# Altium PCB PCB.PcbDoc
Units mil, origin at the board's own origin, x right, y up, seen from the top; angles counter-clockwise.
Board outline 1910 x 1126.76 mil, 2 copper layers (Top Layer, Bottom Layer); 8 components, 4 nets, 21 pads, 1 vias.
Unrouted connection lines stored in the file: 1.
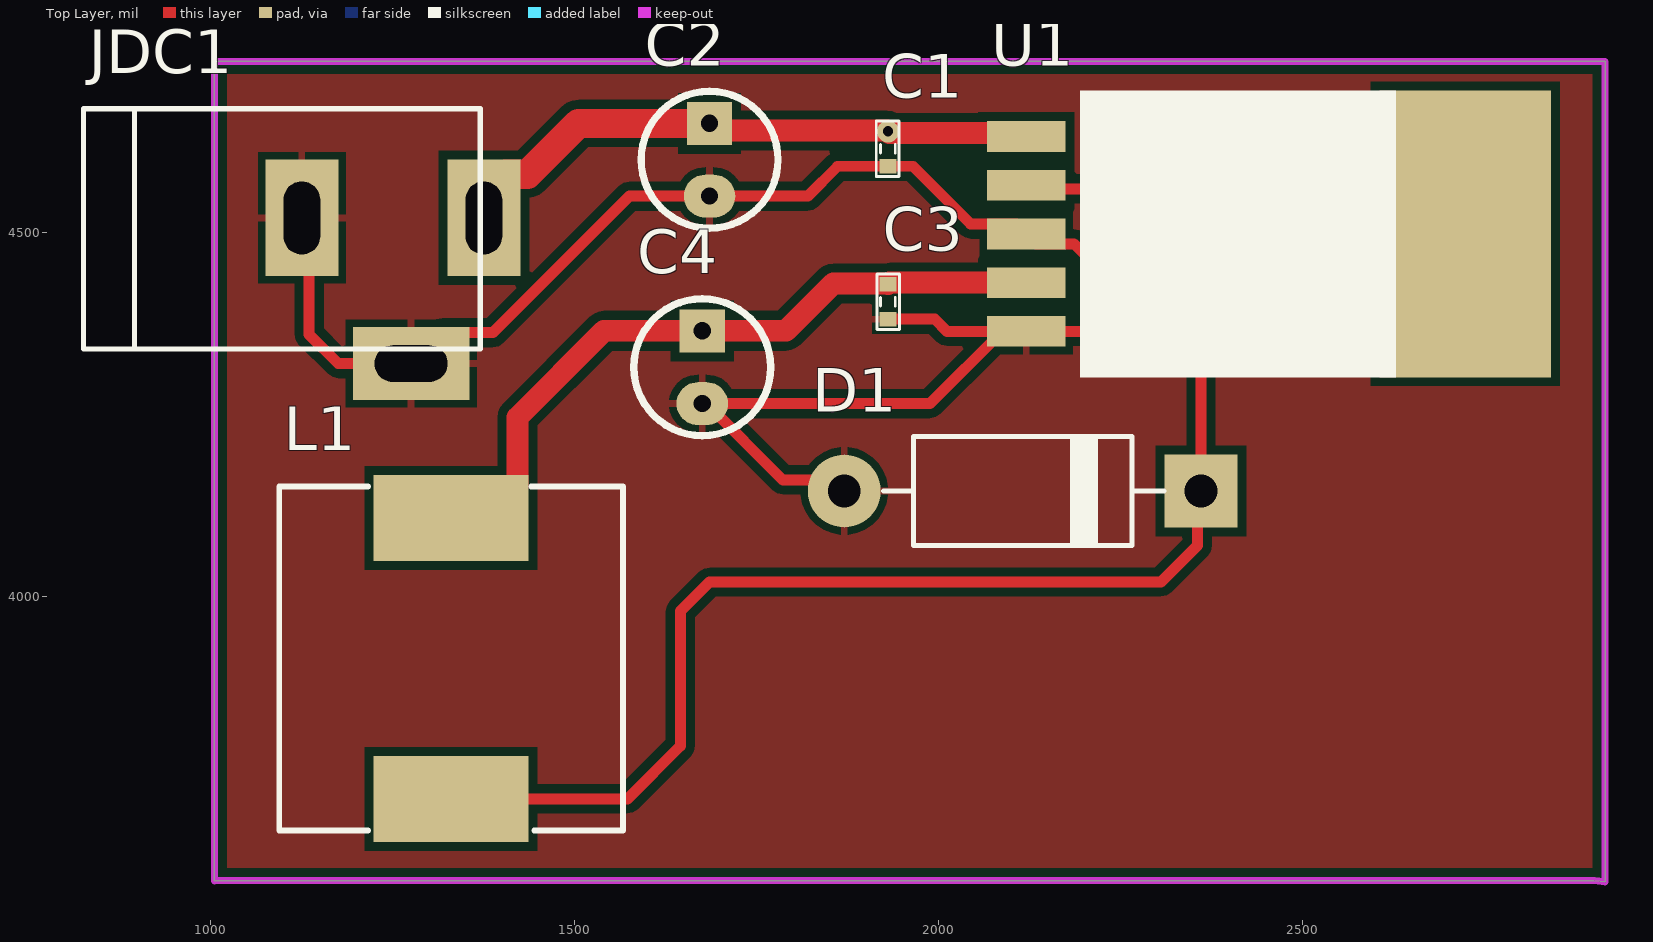
[diagram p0: Top Layer view]
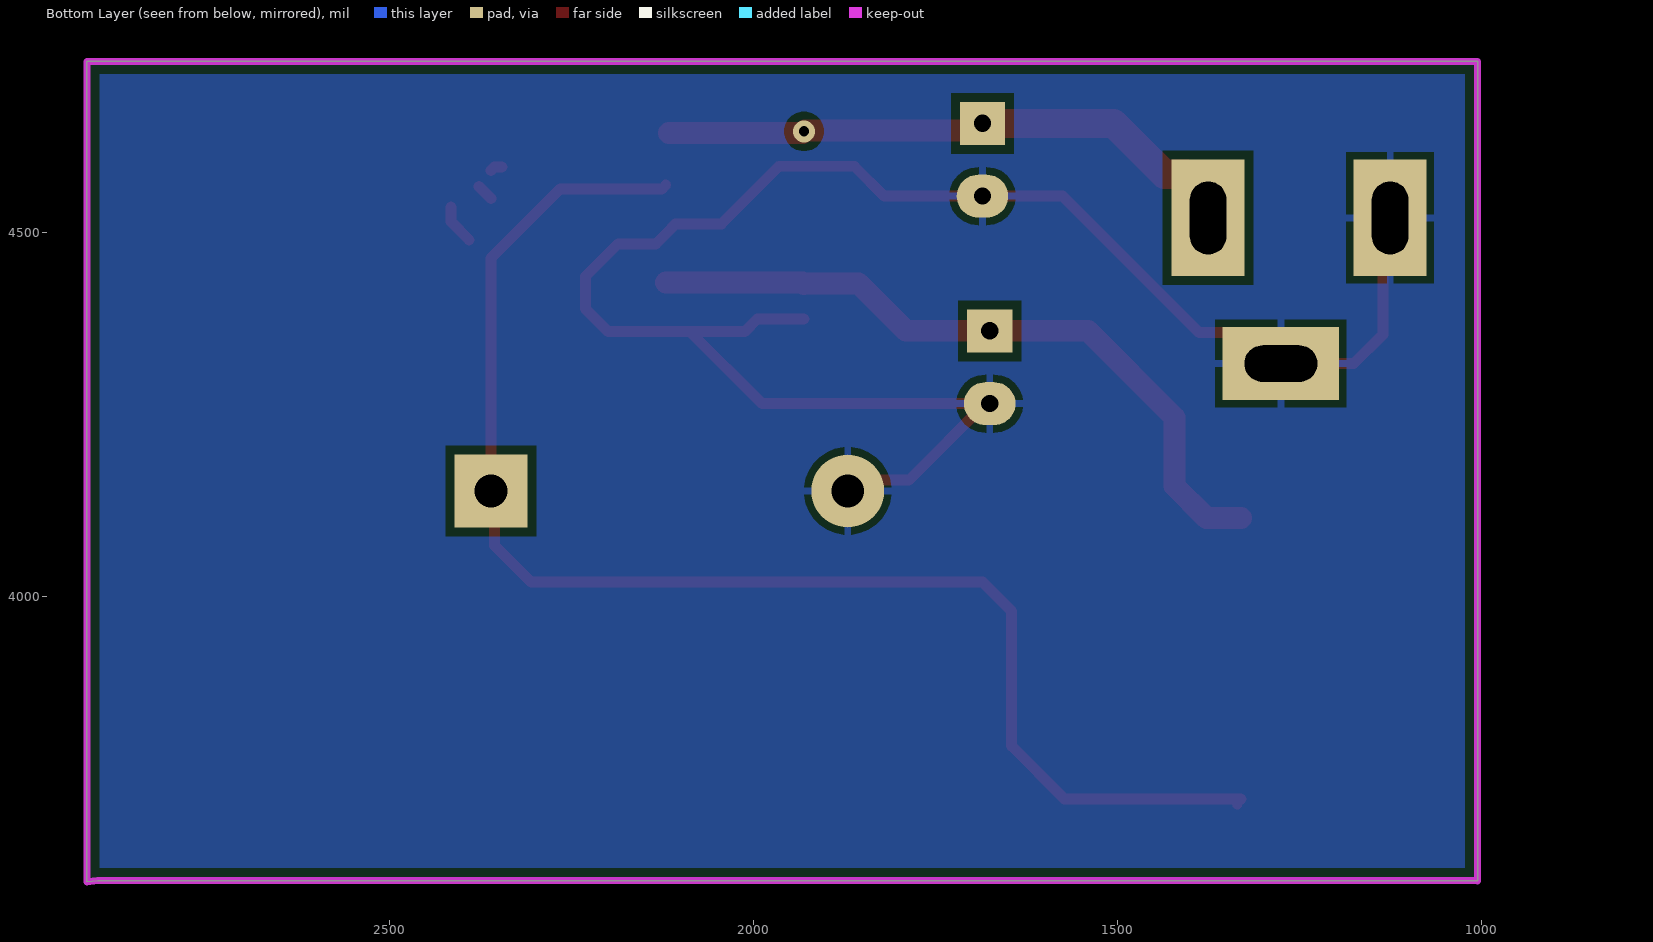
[diagram p1: Bottom Layer view, seen from below]
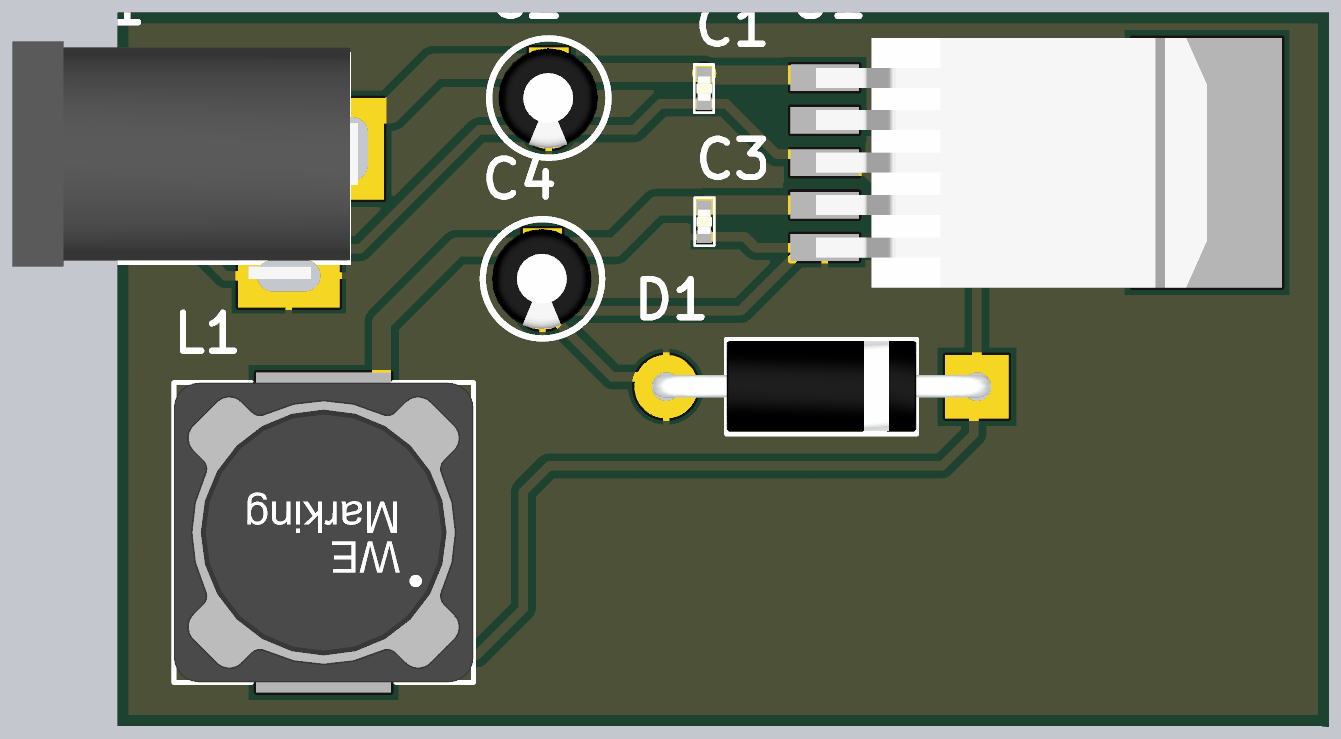
[diagram p2: 3D render of the assembled board from above, using the file's embedded part models]

## Layer stack, top to bottom
Top Solder: solder mask 0.4, Solder Resist, Dk 3.5
Top Layer: signal copper 1.4
Dielectric 1: dielectric 12.6, FR-4, Dk 4.8
Bottom Layer: signal copper 1.4
Bottom Solder: solder mask 0.4, Solder Resist, Dk 3.5

## Board outline
1005,3609.44 1005,4735 2915,4735 2915,3608.24 2900,3610 1010,3610

## Design rules (kind name [scope] priority, off if disabled: settings)
Clearance [All] p1: gap=12 ignorepadtopadclearanceinfootprint=FALSE
PolygonConnect [All] p1: connectstyle=Relief reliefconductorwidth=10 reliefentries=4 polygonreliefangle="90 Angle" airgapwidth=10
RoutingVias [All] p1: holewidth=14 width=30 viastyle="Through Hole" minholewidth=14 minwidth=30 maxholewidth=28 maxwidth=50
SolderMaskExpansion [All] p1: expansion=4 istentingtop=FALSE
Width [All] p1: maxlimit=40 minlimit=7 preferedwidth=15
30 further rules are at their usual default settings.

## Components (designator, comment, footprint, x,y, rotation, side; value= is the part's Value field where it differs from the comment)
C1 "103" CAP_0402 1930,4615 r90 top value=33p
C2 "104" CA-ALU-2.54 1685,4600 r270 top
C3 "103" CAP_0402 1930,4405 r270 top value=33p
C4 "330nF,10V" CA-ALU-2.54 1675,4315 r270 top value=104
D1 "Diode Schottky" DIO-3A 2385,4145 r180 top
JDC1 "Jac DC" DC-IN 1250,4420 r0 top
L1 "33uH" L-SMD-M-12x10 1330,3915 r180 top value="150 mH"
U1 "LM2976" TO263-5 2121,4498.07 r270 top

## Footprints (in the part's own frame and the unit in brackets; to place one, negate y for a bottom-side part, rotate by r counter-clockwise, add the part's x,y. Pads: shape width x height; smd on the part's side, far side on the other; paste and mask are expansions set on the pad)
CA-ALU-2.54 [mm]
  rect 1.5x1.58 hole 0.6: 1(-1.27,0)
  oval 1.5x1.8 hole 0.6: 2(1.27,0)
  silkscreen extent -2.39,-2.39 2.39,2.39, body extent -2,-2.03 1.99,1.97, height 7.01
CAP_0402 [mm]
  rect 0.5x0.6 smd: 1(-0.61,0) 2(0.61,0)
  silkscreen extent -0.97,-0.38 0.97,0.41, body extent -0.5,-0.27 0.5,0.26, height 0.35
DC-IN [mil] "Jac DC input"
  rect 100x160 hole 50 slot 100 at 90 deg: 1(125,100) 2(-125,100)
  rect 160x100 hole 50 slot 100 at 0 deg: 3(25,-100)
  silkscreen extent -425,-80 120,250, body extent -410,-105 134,269, height 434
DIO-3A [mil] "Diode 3A"
  round 100 hole 45: 1(515,0)
  rect 100x100 hole 45: 2(25,0)
  silkscreen extent 76,-75 461,75, body extent 4,-72 536,70, height 142
L-SMD-M-12x10 [mm] "WE-PDA SMD Shielded Power Inductor, 1210"
  rect 5.4x3 smd: 1(0,4.9) 2(0,-4.9)
  silkscreen extent -6,-6 6,6, body extent -6,-6 6,6, height 9.7
TO263-5 [mm] "LM2576-SMD"
  rect 1.07x2.75 smd: 1(-3.4,-0.025) 2(-1.7,-0.025) 3(0,-0.025) 4(1.7,-0.025) 5(3.4,-0.025)
  rect 10x6 smd: 6(0,15.289)
  silkscreen extent -5,1.85 5,12.87, body extent -5,-0.38 5,15.29, height 4.79

## Part data
C1 C3: library part CapSMD, "Capacitor", LatestRevisionDate=17-Jul-2002, LatestRevisionNote="Re-released for DXP Platform.", PackageReference=RAD-0.3, Published=8-Jun-2000, Publisher="Altium Limited"
C2 C4: library part CAP-ALU-DIP, "Capacitor (Semiconductor SIM Model)", LatestRevisionDate=17-Jul-2002, LatestRevisionNote="Re-released for DXP Platform.", PackageReference=C1206, Publisher="Altium Limited"
D1: "Generic Diode Schottky"
JDC1: library part DCIN, "Jac DC input"
L1: library part Inductor, "Inductor"
U1: library part LM2596, Max Input Voltage="12 V", Max Output Current="3 (6.0 peak) A", Max Output Voltage=mV, Temperature Range="-40 to +125 degC", Category=IC-Power, Min Input Voltage=mV, Min Output Voltage=mV, Mounting Technology="Surface Mount", Status=Unreleased, Supply Voltage=mV

## Via types
v1: diameter 30, hole 14, Top Layer to Bottom Layer, 1 vias

## Nets (pads, with @x,y where several pads share a name; then routed paths per layer and width w, separated by ;. In a path a pad name is that pad's centre, name@x,y a point inside that pad or via, vN(x,y) a via of type N, cw(c..) or ccw(c..) an arc to the next point about the centre after c; other vN are vias at no path point)
+5: C3.1 C4.1 L1.2 U1.4 | length 980
  Top Layer w30: L1.2 1377.24,4107.91 1421.3,4151.97 1421.3,4246.3 1540,4365 C4.1 1790,4365 1855,4430 1929,4430 C3.1 1932.14,4431.14 U1.4
+12: C1.2 C2.1 JDC1.1 U1.1 | length 823.9
  Top Layer w15: C2.1 C2.1@1695,4640 ; C1.2@1929,4640 C1.2@1932.34,4636.66 ; U1.1@2115.27,4636.66 U1.1
  Top Layer w30: C2.1@1695,4640 C1.2@1929,4640 ; C1.2@1932.34,4636.66 U1.1@2115.27,4636.66
  Top Layer w40: JDC1.1 1375,4550 1405,4580 1435,4580 1505,4650 C2.1
  other v1: 1930,4639
GND: C1.1 C2.2 C3.2 C4.2 D1.1 JDC1.2 JDC1.3 U1.3 U1.5 | length 2507
  Top Layer w15: JDC1.2 1135,4510 1135,4360 1175,4320 JDC1.3 1317.5,4362.5 1387.5,4362.5 1575,4550 C2.2 1820,4550 1861,4591 C1.1 1964.31,4591 2043.68,4511.63 2106.44,4511.63 U1.3 2133.56,4484.51 2185.49,4484.51 2230,4440 2230,4395 2199.21,4364.21 U1.5 U1.5@2086.93,4364.21 ; C4.2 C4.2@1680.91,4265 ; D1.1 1854.67,4160.33 1785.58,4160.33 C4.2@1680.91,4265 ; C3.2 1994.27,4381 2011.06,4364.21 U1.5@2086.93,4364.21 ; C4.2@1680.91,4265 1987.72,4265 U1.5@2086.93,4364.21
NetD1_2: D1.2 L1.1 U1.2 | length 1988.6
  Top Layer w15: L1.1@1335,3715 1335,3717.09 L1.1 1572.09,3722.09 1645,3795 1645,3980 1685,4020 2305,4020 2355,4070 2355,4140 D1.2 2360,4465 2265,4560 2125,4560 U1.2 ; 2360,4546.82 2376.59,4563.41
pads on no net: U1.6
copper on no net: | length 72.4
  Top Layer w15: 2345,4590 2355,4590 2360,4585 ; 2390,4490 2415,4515 2415,4535

## Polygon pours and split planes (outlines as drawn)
GND on Bottom Layer "GND_L02_P003" (solid, remove dead copper, pour order 3): 1015,4725 2900,4725 2905,4720 2905,3625 1015,3625
GND on Mechanical 13 "GND_L02_P004" (solid, remove dead copper, pour order 4): 1020,4720 2900,4720 2900,3630 1020,3630
GND on Top Layer "GND_L01_P005" (solid, remove dead copper, pour order 5): 1020,4725 2900,4725 2900,3625 1020,3625 1015,3630

## Keep-outs
Keep-Out Layer:
  the board outline again, w10